# EAGLE board source_eagle (EAGLE 9.6.2)
REV: A
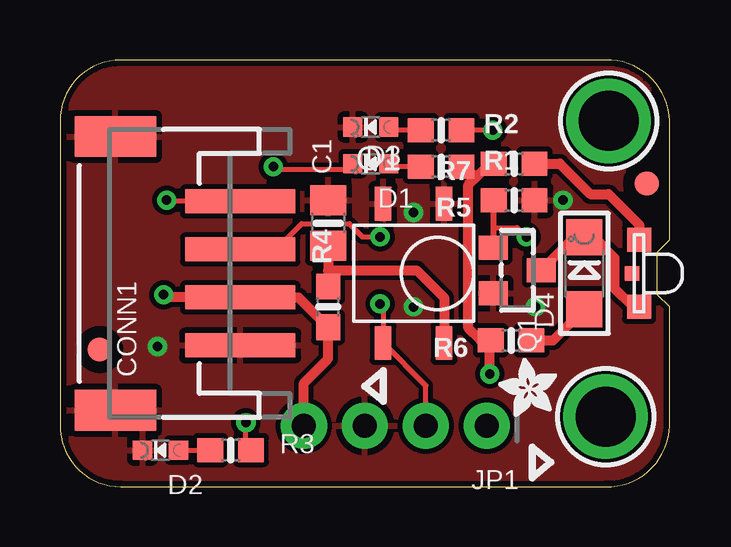
[diagram p0: board, top side]
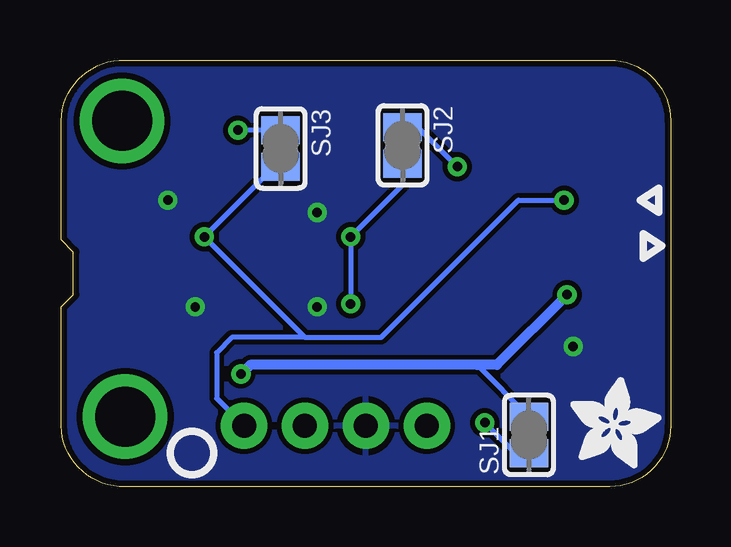
[diagram p1: board, bottom side, seen from below]

Size 25.4 x 17.78 mm. Coordinates in mm from the lower left corner, seen from the top.
Outline: 0,15.24 0,2.54 arc90 2.54,0 22.73,0 arc90 25.4,2.54 25.4,7.49 24.89,8 24.89,9.78 25.4,10.29 25.4,15.24 arc90 22.73,17.78 2.54,17.78 arc90 0,15.24
Copper layers (1*16): Top 0.035mm / dielectric 1.5mm / Bottom 0.035mm
Design rules "adafruit": minimum track width 8mil, minimum drill 15.5mil, track to track 8mil, track to pad 8mil, pad to pad 8mil, via to via 8mil, smd to smd 8mil, copper to edge 10mil, drill to drill 8mil, minimum pad ring 10mil, minimum via ring 8mil, stop-mask expansion 2mil, vias tented up to drill 20mil, thermal gap 10mil
Net classes: 1 HV: width 0.406 mm, drill 0.381 mm, clearance 0.762 mm

## Footprints (pad centres in the part's own frame; a part is rotated, then mirrored left to right if it is on the bottom)
0805-NO = smd 1.24 x 1.5: 1 -0.95,0; 2 0.95,0
JSTPH4 = smd 1 x 4.6: 1 -3,-2.43; 2 -1,-2.43; 3 1,-2.43; 4 3,-2.43 | smd 1.7 x 3.4: NC1 -5.7,2.77; NC2 5.7,2.77
CHIPLED_0603_NOOUTLINE = smd 0.8 x 0.8: A 0,-0.75; C 0,0.75
CHIPLED_1206 = smd 1.5 x 1.5: A 0,-1.496; C 0,1.496
LED_1206_SIDE = smd 1 x 1: A 1.4,0; C -1.4,0 | smd 0.6 x 0.6: MT 0,0.3
FIDUCIAL_1MM = smd 1 x 1: 1 0,0
1X04_ROUND_76 = drill 1 pad 1.93: 1 -3.81,0; 2 -1.27,0; 3 1.27,0; 4 3.81,0
IRM-H6XXT = smd 0.7 x 1.4: 1 1.27,2.9; 2 -1.27,2.9; 3 -1.27,-2.9; 4 1.27,-2.9
SOT23-WIDE = smd 1 x 1.2: 1 -0.95,-1; 2 0.95,-1; 3 0,1
0603-NO = smd 1.075 x 1: 1 -0.85,0; 2 0.85,0
SOLDERJUMPER_CLOSEDWIRE = smd 1.168 x 1.6: 1 -0.762,0; 2 0.762,0 | smd 0.635 x 0.203: WIRE 0,0
MOUNTINGHOLE_2.5_PLATED = drill 2.5 pad 3.2: P$1 0,0

## Placement (x,y rotation side)
C1  10uF  [0805-NO]  11.18,10.99 90 top
CONN1  STEMMA_I2C_RASMT  [JSTPH4]  5.08,8.89 90 top
D1  YELLOW  [CHIPLED_0603_NOOUTLINE]  12.95,13.46 90 top
D2  GREEN  [CHIPLED_0603_NOOUTLINE]  4.19,1.52 90 top
D3  YELLOW  [CHIPLED_0603_NOOUTLINE]  12.95,14.99 90 top
D4  1206 IR 940nm  [CHIPLED_1206]  21.84,8.89 0 top
D5  1206 IR 940nm Side  [LED_1206_SIDE]  24.13,8.89 90 top
FID2  FIDUCIAL_1MM  [FIDUCIAL_1MM]  1.65,5.71 0 top
FID3  FIDUCIAL_1MM  [FIDUCIAL_1MM]  24.45,12.64 0 top
JP1  [1X04_ROUND_76]  13.97,2.54 180 top
O1  IRM-H6XXT  [IRM-H6XXT]  14.73,8.89 0 top
PLABEL0  [PLABEL0]  10.03,12.95 0 top
PLABEL1  [PLABEL1]  8.51,14.48 0 top
PLABEL2  [PLABEL2]  9.02,3.68 0 top
PLABEL3  [PLABEL3]  11.3,0.25 0 top
PLABEL4  [PLABEL4]  13.84,3.68 0 top
PLABEL5  [PLABEL5]  15.88,0.51 0 top
PLABEL6  [PLABEL6]  0.51,1.02 0 top
PLABEL7  [PLABEL7]  1.14,15.88 0 top
PLABEL8  [PLABEL8]  8.76,13.97 90 bottom
PLABEL9  [PLABEL9]  13.97,12.57 90 bottom
PLABEL10  [PLABEL10]  7.24,0.76 90 bottom
PLABEL11  [PLABEL11]  24.77,4.95 0 bottom
PLABEL12  [PLABEL12]  3.68,11.3 0 bottom
PLABEL13  [PLABEL13]  5.59,9.4 0 bottom
PLABEL14  [PLABEL14]  2.92,7.37 0 bottom
PLABEL15  [PLABEL15]  4.45,5.33 0 bottom
PLABEL16  [PLABEL16]  0.38,13.08 90 bottom
PLABEL17  [PLABEL17]  20.83,16.26 0 bottom
Q1  AO3406  [SOT23-WIDE]  19.05,9.02 270 top
R1  10K  [0603-NO]  15.88,13.34 0 top
R2  4.7K  [0603-NO]  15.88,14.86 0 top
R3  33K  [0603-NO]  7.11,1.52 0 top
R4  100  [0603-NO]  11.18,7.49 90 top
R5  10K  [0603-NO]  18.92,11.94 180 top
R6  22  [0603-NO]  18.8,6.1 180 top
R7  22  [0603-NO]  18.92,13.46 180 top
SJ1  [SOLDERJUMPER_CLOSEDWIRE]  5.91,2.16 90 bottom
SJ2  [SOLDERJUMPER_CLOSEDWIRE]  11.18,14.22 270 bottom
SJ3  [SOLDERJUMPER_CLOSEDWIRE]  16.26,14.1 270 bottom
U$1  MOUNTINGHOLE2.5  [MOUNTINGHOLE_2.5_PLATED]  22.73,2.92 0 top
U$5  [PCBFEAT-REV-040]  19.94,1.4 0 bottom
U$8  MOUNTINGHOLE2.5  [MOUNTINGHOLE_2.5_PLATED]  22.86,15.24 0 top
U$12  [ADAFRUIT_3.5MM]  4.19,0.76 0 bottom
U$13  [ADAFRUIT_2.5MM]  20.7,2.92 90 top

## Library data of the parts
C1 D5 JP1 R1-R7 SJ1-SJ3 U$5 U$12 U$13 = microbuilder
CONN1 = adafruit_electromech
D1-D4 Q1 = microbuilder; ROT: 270
FID2 FID3 = microbuilder; BOM: EXCLUDE
O1 = adafruit_sensor; ROT: 270
PLABEL0 PLABEL1-PLABEL17 = pinguin
U$1 U$8 = adafruit_electromech; BOM: EXCLUDE

## Nets
GND: C1.2 CONN1.1 CONN1.NC1 CONN1.NC2 D2.C D3.C JP1.3 O1.1 O1.2 Q1.2 R5.1
IRIN: CONN1.3 JP1.2 O1.3 SJ2.2
IROUT: CONN1.4 JP1.1 Q1.1 R5.2 SJ3.2
N$1: R3.2 SJ1.1
N$2: D1.A R1.1
N$3: D1.C SJ2.1
N$4: C1.1 O1.4 R4.2
N$5: R2.2 SJ3.1
N$6: D3.A R2.1
N$7: D4.C D5.C Q1.3
N$8: D4.A R6.1
N$9: D5.A R7.1
N$26: D2.A R3.1
VIN: CONN1.2 JP1.4 R1.2 R4.1 R6.2 R7.2 SJ1.2

## Tracks (layer width: path | path; a pad name or v marks a point on that pad's centre or on a via)
GND  (via drill 0.39)
  other vias: 14.73,11.43 20.95,11.94 19.81,7.49 14.73,7.49 4.06,5.84
  pour Top: 0,17.78 25.4,17.78 25.4,0 0,0
  pour Bottom: 0,17.78 25.4,17.78 25.4,0 0,0
IRIN  (via drill 0.39)
  Top 0.203: v13.34,7.62 13.46,7.49 O1.3 15.24,4.21 JP1.2 | CONN1.3 9,9.89 10.07,10.96 12.05,10.96 12.6,10.41 v13.34,10.41
  Bottom 0.203: v13.34,7.62 v13.34,10.41 11.18,12.57 SJ2.2
IROUT  (via drill 0.39)
  Top 0.203: CONN1.4 4.49,11.89 v4.45,11.94 | 18.07,10.79 19.05,10.79 v19.43,10.41
  Top 0.254: Q1.1 18.07,9.99 18.07,10.79 R5.2
  Bottom 0.203: 15.24,6.22 v19.43,10.41 16.51,13.34 SJ3.2 | 15.24,6.22 12.06,6.22 6.35,11.94 v4.45,11.94 | 15.24,6.22 18.29,6.22 18.92,5.59 18.92,3.68 JP1.1
N$1  (via drill 0.39)
  Top 0.203: R3.2 7.75,1.74 v7.75,2.67
  Bottom 0.203: v7.75,2.67 6.48,1.4 SJ1.1
N$2
  Top 0.203: R1.1 13.83,13.34 D1.A
N$3  (via drill 0.39)
  Top 0.203: v8.89,13.34 8.89,13.21 11.95,13.21 D1.C
  Bottom 0.203: SJ2.1 10.54,14.99 v8.89,13.34
N$4
  Top 0.406: C1.1 11.18,9.02 | 11.18,9.02 R4.2 | 11.18,9.02 14.86,9.02 16,7.87 O1.4
N$5  (via drill 0.39)
  Top 0.203: v18.03,14.86 R2.2
  Bottom 0.203: SJ3.1 v18.03,14.86
N$6
  Top 0.203: R2.1 13.83,14.86 D3.A
N$7
  Top 0.406: Q1.3 21.42,10.39 D4.C 22.25,10.39 23.11,9.53 23.11,8.26 23.88,7.49 D5.C
N$8
  Top 0.406: R6.1 20.55,6.1 D4.A
N$9
  Top 0.406: R7.1 20.83,13.46 22.1,12.19 22.86,12.19 24.13,10.92 D5.A
N$26
  Top 0.203: D2.A R3.1
VIN  (via drill 0.39)
  Top 0.203: R1.2 17.02,13.34 17.4,12.95
  Top 0.406: JP1.4 10.16,4.32 11.18,5.33 R4.1 9.93,7.89 CONN1.2 4.43,7.89 v4.32,8 | R6.2 17.91,6.1 | 17.91,6.1 17.53,6.1 17.02,6.6 17.02,12.57 17.4,12.95 17.91,13.46 R7.2 | v17.91,4.7 17.91,6.1
  Bottom 0.203: SJ1.2 8.06,5.08
  Bottom 0.406: v4.32,8 7.24,5.08 8.06,5.08 17.53,5.08 v17.91,4.7

## Text on the board
Pinguin_tBackup: 38KHz IR Transceiver | V | H | ON | Signal High / To Send | OUT | IN | VIN | IRin | 38KHz IR Recv | 940nm Infrared / LED Emitters | Sig | ON | IRout | GND
Pinguin_bBackup: Logic/Power: 3~5VDC | V+:3~5VDC | OUT | Vin/Vlogic: 3~5VDC | IN | 100mA+ Current/LED | JST / PH | LED | IN | In | On | 38KHz / Infrared / Remote / Decoding / Receiver | V+ | OUT | Vin | SIG | GND | Sig | 38KHz 940nm IR / Remote Receiver / & LED Transmitters | GND | Optional / 5mm LED | Sig | IRV | IRH | In | V+ | GND | ON